# Altium PCB PCB.PcbDoc
Units mm, origin at the board's own origin, x right, y up, seen from the top; angles counter-clockwise.
Board outline 149.99 x 100.08 mm, 2 copper layers (Top Layer, Bottom Layer); 19 components, 18 nets, 95 pads, 6 vias.
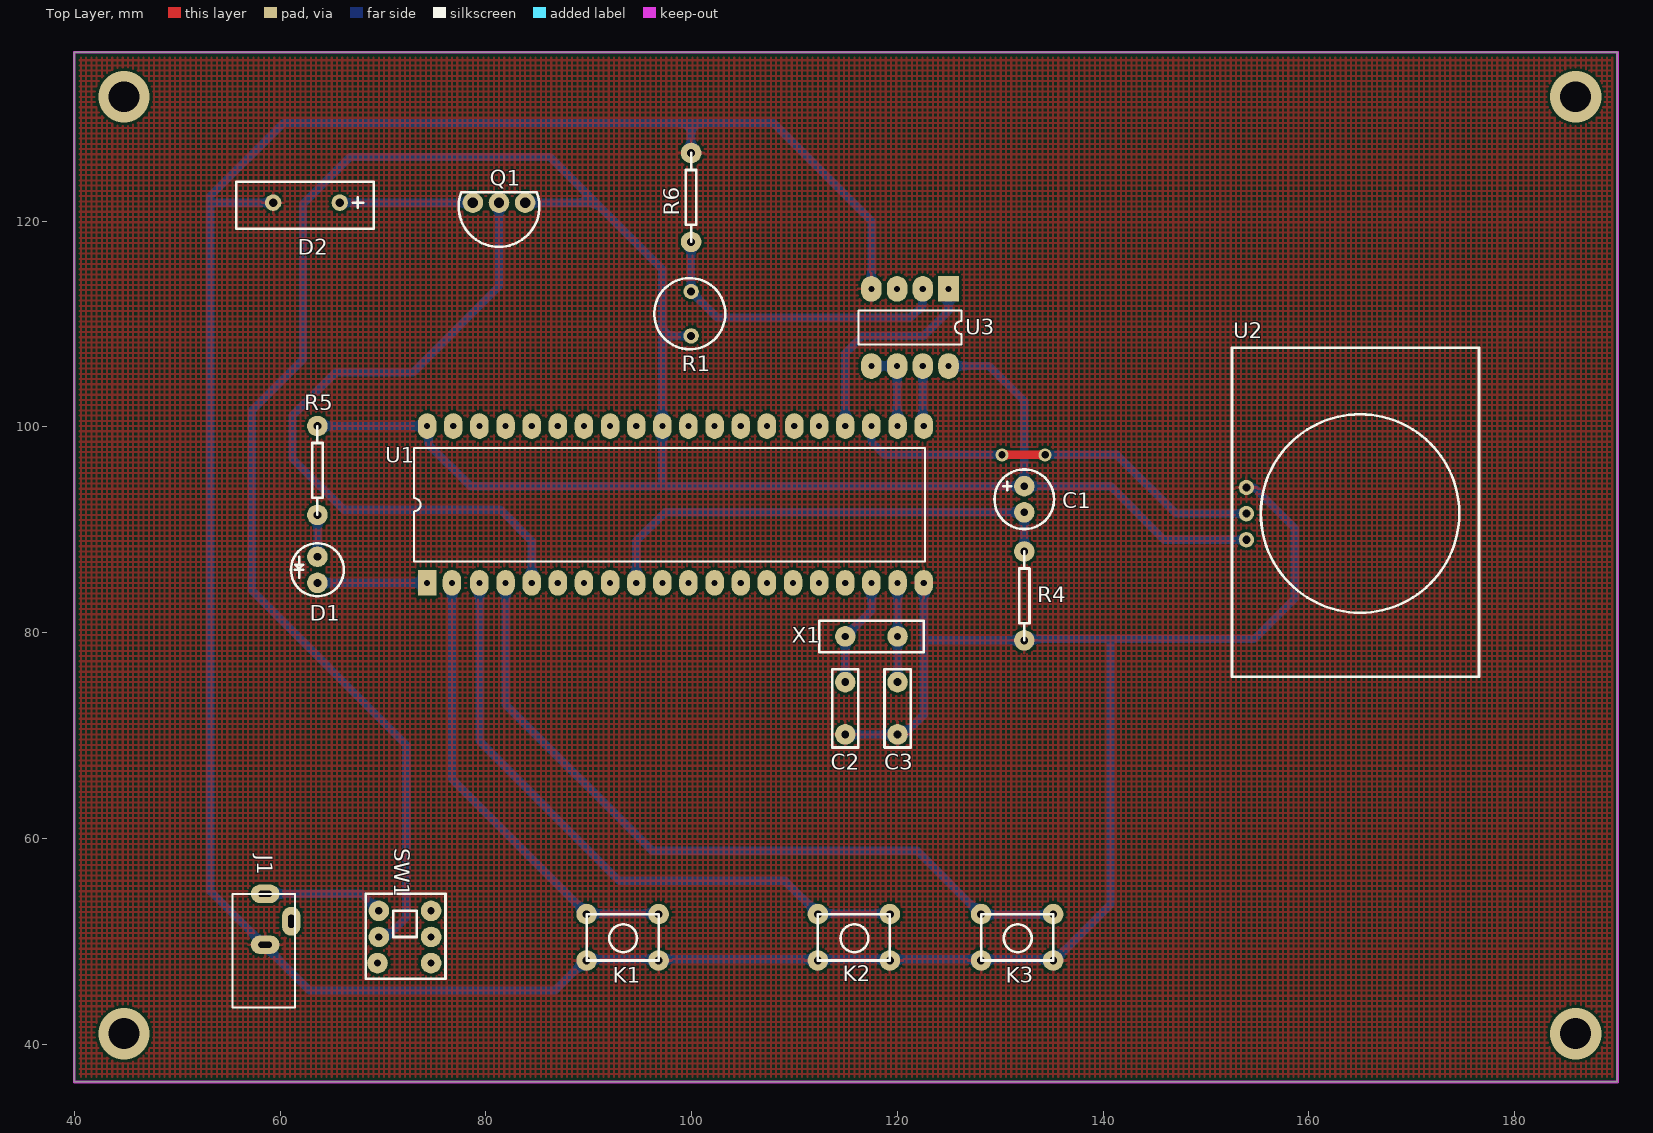
[diagram p0: Top Layer view]
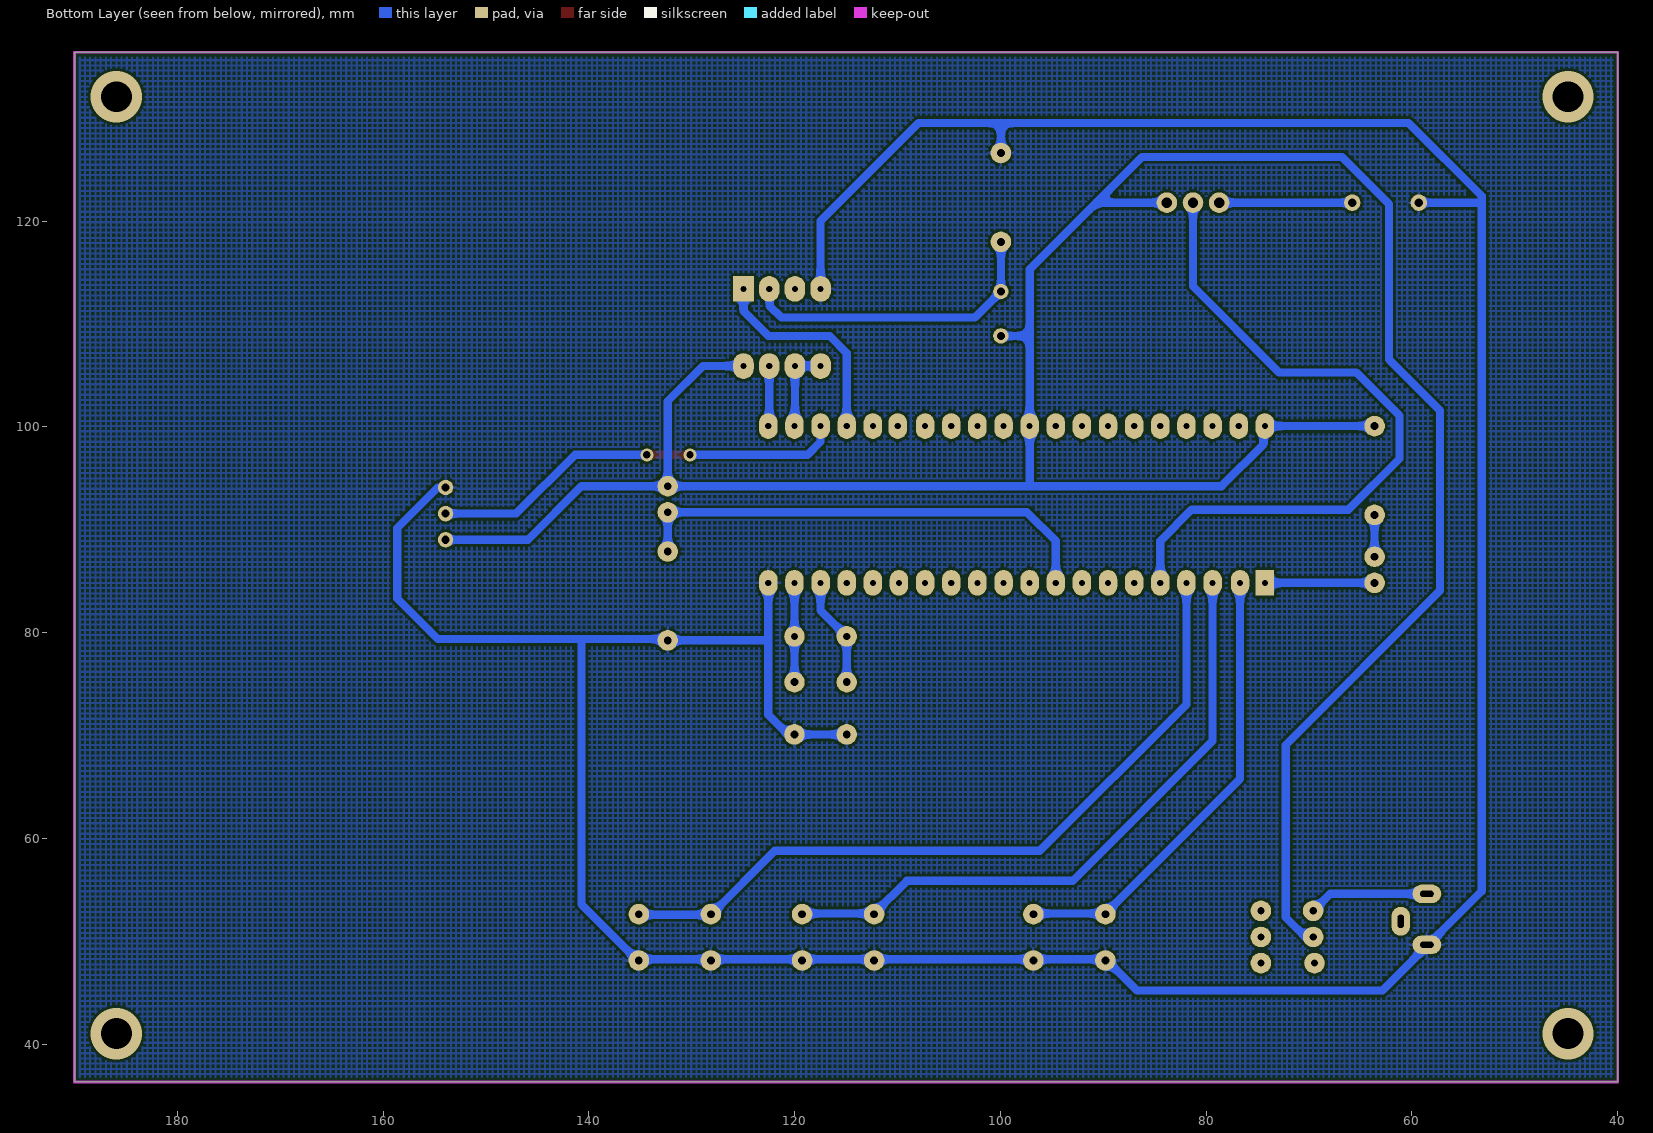
[diagram p1: Bottom Layer view, seen from below]

## Layer stack, top to bottom
Top Solder: solder mask 0.0102, Solder Resist, Dk 3.5
Top Layer: signal copper 0.0356
Dielectric1: dielectric 0.32, FR-4, Dk 4.8
Bottom Layer: signal copper 0.0356
Bottom Solder: solder mask 0.0102, Solder Resist, Dk 3.5

## Board outline
40.005,136.398 189.992,136.398 189.992,36.322 40.005,36.322 40.005,136.398

## Design rules (kind name [scope] priority, off if disabled: settings)
Clearance [All] p1: gap=0.254 ignorepadtopadclearanceinfootprint=FALSE except(0: Arc-Hole Track-Hole SMDPad-Hole THPad-Hole Via-Hole Fill-Hole Poly-Hole Region-Hole Text-Hole)
FabricationTestPointUsage TestPointUsage [All] p1: valid=0 allowmultiple=FALSE
FabricationTestpoint Testpoint [All] p1: side=3 testpointundercomponent=TRUE minsize=1.016 maxsize=2.54 preferedsize=1.524 minholesize=0 maxholesize=1.016 preferedholesize=0.813 testpointgrid=0.025 allowsidetop=TRUE allowsidebottom=TRUE usegrid=TRUE gridtolerance=0
PolygonConnect [All] p1: connectstyle=Relief reliefconductorwidth=0.254 reliefentries=4 polygonreliefangle="90 Angle" airgapwidth=0.254
RoutingVias [All] p1: holewidth=0.711 width=1.27 viastyle="Through Hole" minholewidth=0.111 minwidth=0.1 maxholewidth=1 maxwidth=2
SilkToSolderMaskClearance SilkscreenOverComponentPads [IsPad] p1: minsilkscreentomaskgap=0.254 clearancetoexposedcopper=TRUE
SolderMaskExpansion [All] p1: expansion=0.102
Width [All] p1: maxlimit=1 minlimit=0.254 preferedwidth=0.254 minimp=50.000000 maximp=50.000000 favimp=50.000000
27 further rules are at their usual default settings.

## Components (designator, comment, footprint, x,y, rotation, side; value= is the part's Value field where it differs from the comment)
C1 "10uF" CAP_2 132.334,94.234 r270 top
C2 "30pF" CAP 114.935,70.104 r90 top
C3 "30pF" CAP 120.015,70.104 r90 top
D1 "" LED 63.627,87.376 r270 top
D2 "USB-Light" "USB-A - 2" 65.786,121.793 r180 top
J1 "power" DC3.5 58.547,54.61 r270 top
K1 "KEY" KEY 89.789,48.133 r0 top
K2 "KEY" KEY 112.268,48.133 r0 top
K3 "KEY" KEY 128.143,48.133 r0 top
Q1 "8550" NPN 83.82,121.793 r180 top
R1 "RG" RG 99.949,113.157 r270 top
R4 "10K" RES 132.334,78.486 r90 top
R5 "1K" RES 63.627,90.678 r90 top
R6 "10K" RES 99.949,127.381 r270 top
SW1 "SWT" SWT 69.596,52.959 r0 top
U1 "STC89C52" DIP40 74.295,84.836 r90 top
U2 "HC-SR501" HC-SR501 153.924,89.027 r90 top
U3 "ADC0832" DIP8 124.968,113.411 r270 top
X1 "12M" XTAL 114.935,79.629 r0 top

## Footprints (in the part's own frame and the unit in brackets; to place one, negate y for a bottom-side part, rotate by r counter-clockwise, add the part's x,y. Pads: shape width x height; smd on the part's side, far side on the other; paste and mask are expansions set on the pad)
CAP [mm]
  round 2 hole 0.762: 1(0,0) 2(5.08,0)
  silkscreen extent -1.27,-1.27 6.35,1.27
CAP_2 [mm]
  round 2 hole 0.762: 1(0,0) 2(2.54,0)
  silkscreen extent -1.62,-2.9 4.16,2.9
DC3.5 [mm]
  oval 1.8x2.8 hole 0.6 slot 1.3 at 90 deg: 1(0,0) 2(4.953,0)
  oval 2.8x1.8 hole 0.6 slot 1.3 at 0 deg: ""(2.667,2.54)
  silkscreen extent 0,-3.17 11.05,2.92
DIP8 [mm]
  rect 2.5x2 hole 0.6: 1(0,0)
  oval 2.5x2 hole 0.6: 2(0,-2.5) 3(0,-5) 4(0,-7.5) 5(7.5,-7.5) 6(7.5,-5) 7(7.5,-2.5) 8(7.5,0)
  silkscreen extent 2.08,-8.75 5.42,1.25
DIP40 [mm]
  rect 2.5x1.8 / inner rect 2.5x1.2 / far side rect 2.5x1.8 hole 0.6: 1(0,0)
  oval 2.5x1.8 / inner oval 2.5x1.2 / far side oval 2.5x1.8 hole 0.6: 2(0,-2.413) 3(0,-5.08) 4(0,-7.62) 5(0,-10.16) 6(0,-12.7) 7(0,-15.24) 8(0,-17.78) 9(0,-20.32) 10(0,-22.86) 11(0,-25.4) 12(0,-27.94) 13(0,-30.48) 14(0,-33.02) 15(0,-35.56) 16(0,-38.1) 17(0,-40.64) 18(0,-43.18) 19(0,-45.72) 20(0,-48.26) 21(15.24,-48.26) 22(15.24,-45.72) 23(15.24,-43.18) 24(15.24,-40.64) 25(15.24,-38.1) 26(15.24,-35.687) 27(15.24,-33.02) 28(15.24,-30.48) 29(15.24,-27.94) 30(15.24,-25.4) 31(15.24,-22.86) 32(15.24,-20.32) 33(15.24,-17.78) 34(15.24,-15.24) 35(15.24,-12.7) 36(15.24,-10.16) 37(15.24,-7.62) 38(15.24,-5.08) 39(15.24,-2.54) 40(15.24,0)
  silkscreen extent 2.08,-48.39 13.12,1.29
HC-SR501 [mm]
  round 1.5 hole 0.8: 1(0,0) 2(2.54,0) 3(5.08,0)
  silkscreen extent -13.33,-22.61 18.67,1.4
KEY [mm]
  round 2 hole 0.762: 1(0,0) 1(7,0) 2(0,4.5) 2(7,4.5)
  silkscreen extent 0,0 7,4.5
LED [mm]
  round 2 hole 0.762: 1(0,0) 2(2.54,0)
  silkscreen extent -1.3,-2.57 3.84,2.57
NPN [mm]
  round 2 hole 1: B(2.54,0) C(5.08,0) E(0,0)
  silkscreen extent -1.38,-1.01 6.46,4.3
RES [mm]
  round 2 hole 0.762: 1(0.762,0) 2(9.398,0)
  silkscreen extent 0.76,-0.51 9.4,0.51
RG [mm]
  round 1.5 hole 0.8: 1(0,0) 2(4.318,0)
  silkscreen extent -1.29,-3.58 5.61,3.33
SWT [mm]
  round 2 hole 0.7: 1(0,0) 2(0,-2.54) 3(-0.127,-5.08) 4(5.08,-5.08) 5(5.08,-2.54) 6(5.08,0)
  silkscreen extent -1.27,-6.6 6.48,1.65
"USB-A - 2" [mm]
  round 1.6 hole 0.8: 1(-0.015,0) 2(6.462,0)
  silkscreen extent -3.3,-2.03 10.03,2.54
XTAL [mm]
  round 2 hole 0.7: 1(0,0) 2(5.08,0)
  silkscreen extent -2.54,-1.52 7.62,1.52

## Part data
C1: library part CAP_2
C2 C3: library part CAP
D1: library part LED
J1: library part DC5.5
Q1: library part PNP
R4 R5 R6: library part Res
X1: library part XTAL

## Via types
v1: diameter 5, hole 3, Top Layer to Bottom Layer, 4 vias
v2: diameter 1.27, hole 0.711, Top Layer to Bottom Layer, 2 vias

## Nets (pads, with @x,y where several pads share a name; then routed paths per layer and width w, separated by ;. In a path a pad name is that pad's centre, name@x,y a point inside that pad or via, vN(x,y) a via of type N, cw(c..) or ccw(c..) an arc to the next point about the centre after c; other vN are vias at no path point)
CLK: U1.21 U3.7 | length 5.9
  Bottom Layer w0.8: U3.7 122.468,100.163 U1.21
CS: U1.24 U3.1 | length 21
  Bottom Layer w0.8: U1.24 114.935,107.188 116.586,108.839 122.555,108.839 124.968,111.252 U3.1
DAT: U1.22 U3.5 U3.6 | length 8.4
  Bottom Layer w0.8: U3.5@117.388,105.918 U3.6@119.888,105.918 ; U1.22@119.888,100.076 119.968,100.156 U3.6
GND: C2.1 C3.1 D2.2 J1.2 K1.1 K2.1 K3.1 R4.1 R6.1 U1.20 U2.3 U3.4 | length 346.7
  Bottom Layer w0.8: 53.34,121.793 D2.2 ; R6.1 99.949,129.54 ; C2.1 C3.1 ; U3.4@117.475,113.411 117.475,120.015 107.95,129.54 99.949,129.54 ; C3.1@120.396,69.85 122.555,72.009 U1.20 ; 122.809,79.248 R4.1 ; R4.1@132.207,79.375 154.686,79.375 158.623,83.312 158.623,90.17 154.686,94.107 U2.3 ; 140.716,79.248 140.716,53.594 135.255,48.133 135.128,48.26 119.268,48.26 89.789,48.26 86.741,45.212 62.865,45.212 53.213,54.864 53.213,122.428 60.325,129.54 99.949,129.54
Human: U1.23 U2.2 | length 41
  Top Layer w0.8: v2(130.175,97.282) v2(134.366,97.282) v2@134.493,97.282
  Bottom Layer w0.8: U1.23 117.475,98.552 118.745,97.282 v2(130.175,97.282) ; v2(134.366,97.282) 141.351,97.282 147.066,91.567 U2.2
KEY1: K1.2 U1.2 | length 44.5
  Bottom Layer w0.8: U1.2 76.708,65.786 89.789,52.705 K1.2@96.774,52.705
KEY2: K2.2 U1.3 | length 62.3
  Bottom Layer w0.8: U1.3 79.375,69.469 92.964,55.88 109.093,55.88 112.268,52.705 K2.2@119.38,52.705
KEY3: K3.2 U1.4 | length 73.5
  Bottom Layer w0.8: U1.4 81.915,73.025 96.139,58.801 121.92,58.801 128.143,52.578 K3.2@135.128,52.578
LED: D1.2 U1.1 | length 10.8
  Bottom Layer w0.8: D1.2 U1.1 U1.1@74.422,84.836
Lighten: Q1.B U1.5 | length 68.1
  Bottom Layer w0.8: Q1.B 81.28,113.665 72.898,105.283 65.405,105.283 61.214,101.092 61.214,96.901 66.167,91.948 81.407,91.948 84.455,88.9 U1.5@84.455,84.963
NetC1_2: C1.2 R4.2 U1.9 | length 46.9
  Bottom Layer w0.8: U1.9 94.615,88.9 97.409,91.694 C1.2 R4.2 R4.2@132.334,87.757
NetC2_2: C2.2 U1.18 X1.1 | length 10.7
  Bottom Layer w0.8: C2.2 X1.1 117.475,82.169 U1.18
NetC3_2: C3.2 U1.19 X1.2 | length 9.7
  Bottom Layer w0.8: C3.2 X1.2 U1.19
NetD1_1: D1.1 R5.1 | length 4.2
  Bottom Layer w0.8: D1.1@63.627,87.249 D1.1 R5.1
NetD2_1: D2.1 Q1.C | length 13.1
  Bottom Layer w0.8: D2.1 Q1.C Q1.C@78.867,121.793
NetJ1_1: J1.1 SW1.1 | length 11.9
  Bottom Layer w0.8: J1.1 67.945,54.61 SW1.1 SW1.1@69.723,52.832
NetR1_1: R1.1 R6.2 U3.2 | length 30.4
  Bottom Layer w0.8: R6.2 R1.1 102.489,110.617 121.285,110.617 122.428,111.76 U3.2@122.428,113.284
VCC: C1.1 Q1.E R1.2 R5.2 SW1.2 U1.31 U1.40 U2.1 U3.8 | length 265.4
  Bottom Layer w0.8: R5.2 U1.40 74.422,100.076 74.422,98.298 78.486,94.234 C1.1 ; SW1.2@70.104,50.165 72.263,52.324 72.263,69.088 57.277,84.074 57.277,101.6 62.23,106.553 62.23,121.666 66.802,126.238 86.233,126.238 90.678,121.793 ; Q1.E 90.678,121.793 ; 97.155,94.488 U1.31 97.155,108.839 ; R1.2 97.155,108.839 ; U3.8@124.968,105.918 128.905,105.918 132.334,102.489 C1.1 ; U2.1 145.923,89.027 140.716,94.234 C1.1 ; 90.678,121.793 97.155,115.316 97.155,108.839
pads on no net: J1. SW1.3 SW1.4 SW1.5 SW1.6 U1.6 U1.7 U1.8 U1.10 U1.11 U1.12 U1.13 U1.14 U1.15 U1.16 U1.17 U1.25 U1.26 U1.27 U1.28 U1.29 U1.30 U1.32 U1.33 U1.34 U1.35 U1.36 U1.37 U1.38 U1.39 U3.3
copper on no net:
  other v1: 44.831,41.021 185.928,41.021 44.831,132.08 185.928,132.08

## Polygon pours and split planes (outlines as drawn)
GND on Top Layer "Bottom Layer-No Net" (hatched 90Degree grid 0.508 track 0.203, remove dead copper, pour order 4): 40.132,136.271 40.259,136.144 189.738,136.144 189.738,36.576 40.259,36.576
GND on Bottom Layer "Bottom Layer-No Net" (hatched 90Degree grid 0.508 track 0.203, remove dead copper, pour order 6): 40.386,136.017 189.611,136.017 189.611,36.703 40.386,36.703

## Keep-outs
Keep-Out Layer:
  lines w0.254: 189.992,36.322 189.992,136.398 40.005,136.398 40.005,36.322 190.005,36.322